# EAGLE board PowerBus (EAGLE 6.4)
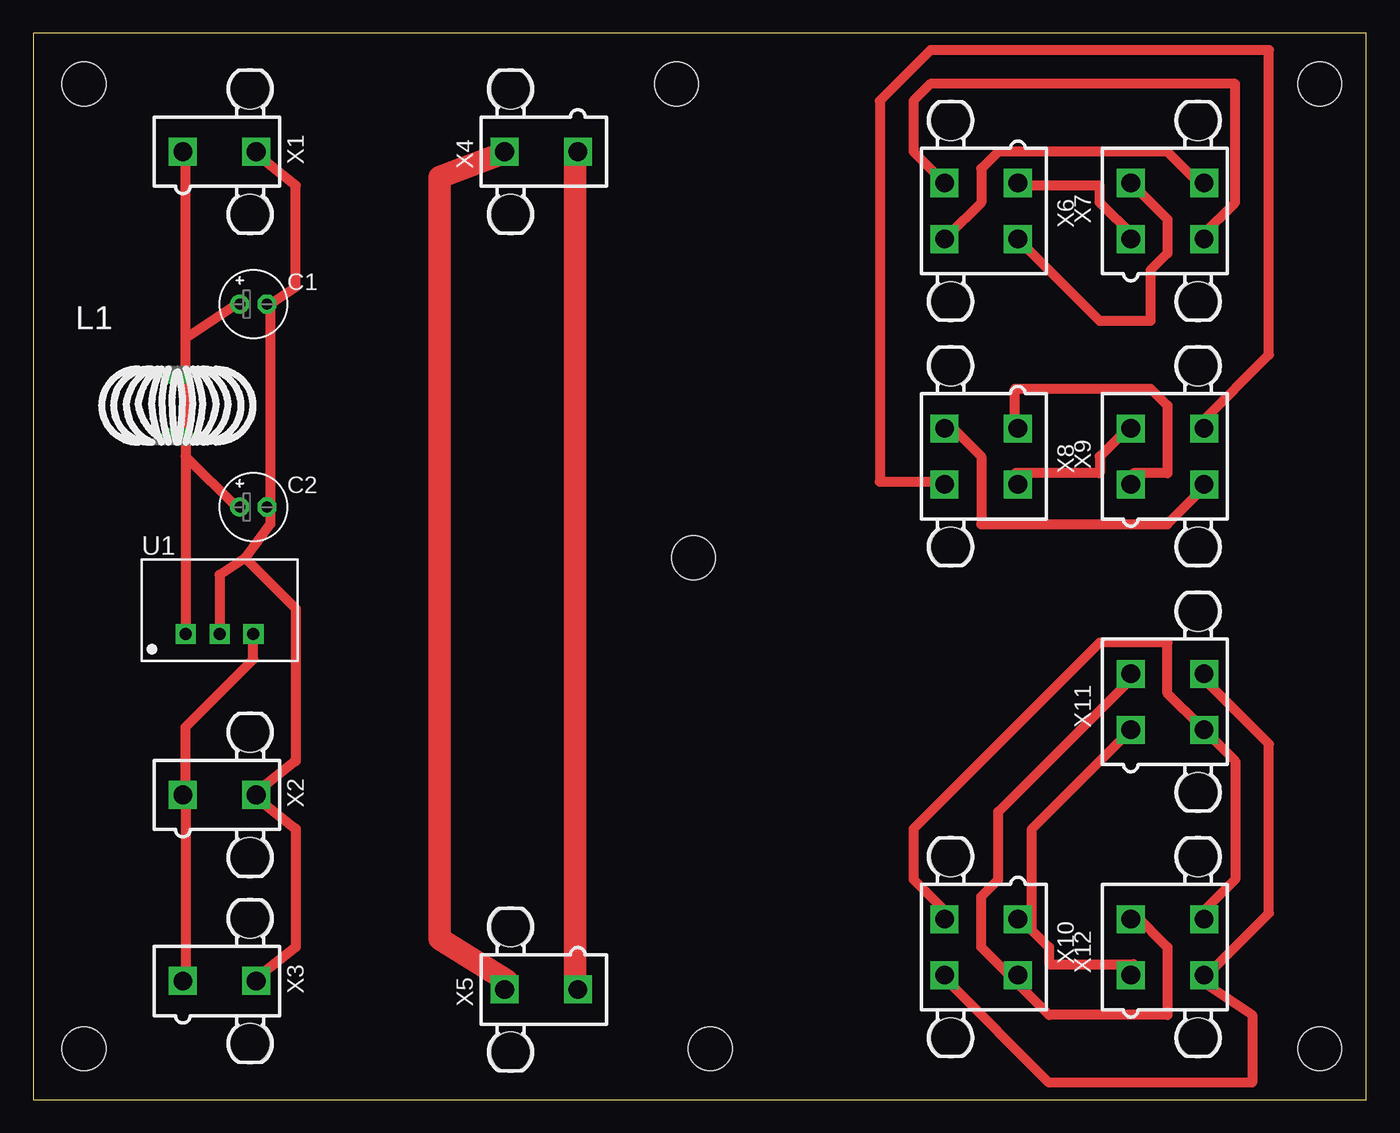
[diagram p0: board, top side]

Size 100 x 80 mm. Coordinates in mm from the lower left corner, seen from the top.
Outline: 0,0 100,0 100,80 0,80 0,0
Copper layers (1*16): Top 0.035mm / dielectric 1.5mm / Bottom 0.035mm
Design rules "SparkFun *": minimum track width 30mil, minimum drill 20mil, track to track 32mil, track to pad 32mil, pad to pad 24mil, via to via 24mil, smd to smd 8mil, copper to edge 30mil, drill to drill 30mil, minimum pad ring 12mil, minimum via ring 10mil, stop-mask expansion 4mil, vias tented up to drill 25mil, thermal gap 10mil

## Footprints (pad centres in the part's own frame; a part is rotated, then mirrored left to right if it is on the bottom)
E2-5 = drill 0.813 pad 1.27: + -1.016,0 | drill 0.813 pad 1.27 octagon: - 1.016,0
MCAP103722016A-8R2MU = drill 0.6 long: 1 0,2.261; 2 0,-2.261
TSR-1 = drill 0.9 square: 1 -2.54,0; 2 0,0; 3 2.54,0
STAND-OFF = hole 3.302: 0,0
5566-2 = drill 1.4 square: 1 0,-2.75; 2 0,2.75 | hole 3: 4.7,2.29; -4.7,2.29
5566-4 = drill 1.4 square: 1 2.1,-2.75; 2 -2.1,-2.75; 3 2.1,2.75; 4 -2.1,2.75 | hole 3: 6.8,2.29; -6.8,2.29

## Placement (x,y rotation side)
C1  4.7uF/50V  [E2-5]  16.51,59.69 0 top
C2  4.7uF/50V  [E2-5]  16.51,44.45 0 top
L1  8.2uH/.02ohm/2A  [MCAP103722016A-8R2MU]  10.79,52.07 0 top
U1  TSR_1-24120  [TSR-1]  13.97,34.92 0 top
U$1  [STAND-OFF]  3.81,76.2 0 top
U$2  [STAND-OFF]  3.81,3.81 0 top
U$3  [STAND-OFF]  50.8,3.81 0 top
U$4  [STAND-OFF]  96.52,76.2 0 top
U$5  [STAND-OFF]  96.52,3.81 0 top
U$6  [STAND-OFF]  48.26,76.2 0 top
U$7  [STAND-OFF]  49.53,40.64 0 top
X1  5566-2  [5566-2]  13.97,71.12 270 top
X2  5566-2  [5566-2]  13.97,22.86 270 top
X3  5566-2  [5566-2]  13.97,8.89 270 top
X4  5566-2  [5566-2]  38.1,71.12 90 top
X5  5566-2  [5566-2]  38.1,8.26 90 top
X6  5566-4  [5566-4]  71.12,66.67 90 top
X7  5566-4  [5566-4]  85.09,66.67 270 top
X8  5566-4  [5566-4]  71.12,48.26 90 top
X9  5566-4  [5566-4]  85.09,48.26 270 top
X10  5566-4  [5566-4]  71.12,11.43 90 top
X11  5566-4  [5566-4]  85.09,29.84 270 top
X12  5566-4  [5566-4]  85.09,11.43 270 top

## Library data of the parts
C1 C2 = rcl
L1 = inductor-multicomp
U1 = _traco_tsr-1
U$1-U$7 = SparkFun-Electromechanical
X1-X5 = con-molex; OC_FARNELL: 1822072; OC_NEWARK: unknown
X6-X12 = con-molex; OC_FARNELL: unknown; OC_NEWARK: unknown

## Nets
GND: C1.- C2.- U1.2 X1.2 X2.2 X3.2
N$1: X6.1 X7.1
N$2: X6.2 X7.2
N$3: X6.3 X7.3
N$4: X6.4 X7.4
N$5: X4.1 X5.1
N$6: X4.2 X5.2
N$7: X8.1 X9.1
N$8: X8.2 X9.2
N$9: X8.3 X9.3
N$10: X8.4 X9.4
N$11: X10.1 X11.1 X12.1
N$12: X10.2 X11.2 X12.2
N$13: X10.3 X11.3 X12.4
N$14: X10.4 X11.4 X12.3
VI: C1.+ C2.+ L1.1 L1.2 U1.1 X1.1
VO: U1.3 X2.1 X3.1

## Tracks (layer width: path | path; a pad name or v marks a point on that pad's centre or on a via)
GND
  Top 0.762: 16.51,22.86 19.68,20.32 19.68,11.43 16.51,8.89 X3.2 | 17.78,59.69 17.78,44.45 | U1.2 13.97,39.37 15.88,40.64 | 15.88,40.64 17.78,43.18 17.78,44.45 | 17.78,44.45 C2.- | 17.78,59.69 19.68,60.96 19.68,68.58 16.51,71.12 X1.2 | 17.78,59.69 C1.- | 16.51,22.86 19.68,25.4 19.68,36.83 15.88,40.64 | 16.51,22.86 X2.2
N$1
  Top 0.762: X6.1 73.66,68.58 80.01,68.58 80.01,67.31 82.55,64.77 X7.1
N$2
  Top 0.762: X6.2 73.66,64.77 80.01,58.42 83.82,58.42 83.82,62.23 85.09,63.5 85.09,66.04 82.55,68.58 X7.2
N$3
  Top 0.762: X6.3 68.58,68.58 66.04,71.12 66.04,74.93 67.31,76.2 90.17,76.2 90.17,67.31 87.63,64.77 X7.3
N$4
  Top 0.762: X6.4 68.58,64.77 71.12,67.31 71.12,69.85 72.39,71.12 85.09,71.12 87.63,68.58 X7.4
N$5
  Top 0.762: 40.64,8.89 X5.1 | 40.64,71.12 X4.1
  Top 1.676: 40.64,71.12 40.64,8.89
N$6
  Top 0.762: 35.56,8.89 X5.2 | 35.56,71.12 X4.2
  Top 1.676: 35.56,8.89 30.48,12.06 30.48,69.22 35.56,71.12
N$7
  Top 0.762: X9.1 82.55,46.99 85.09,46.99 85.09,52.07 83.82,53.34 73.66,53.34 73.66,50.8 X8.1
N$8
  Top 0.762: X8.2 73.66,46.99 80.01,46.99 80.01,48.26 82.55,50.8 X9.2
N$9
  Top 0.762: X9.3 87.63,45.72 85.09,43.18 71.12,43.18 71.12,48.26 68.58,50.8 X8.3
N$10
  Top 0.762: X8.4 68.58,46.35 63.5,46.35 63.5,74.93 67.31,78.74 92.71,78.74 92.71,55.88 87.63,50.8 X9.4
N$11
  Top 0.762: 74.93,12.7 73.66,13.97 X10.1 | 74.93,12.7 76.2,11.43 76.2,10.16 82.55,10.16 X12.1 | 74.93,12.7 74.93,20.32 82.55,27.94 X11.1
N$12
  Top 0.762: 73.66,8.89 76.2,6.35 85.09,6.35 85.09,11.43 82.55,13.97 X12.2 | 73.66,8.89 71.12,11.43 71.12,15.24 72.39,16.51 72.39,21.59 82.55,31.75 X11.2 | 73.66,8.89 X10.2
N$13
  Top 0.762: 87.63,27.94 85.09,30.48 85.09,34.29 80.01,34.29 66.04,20.32 66.04,16.51 68.58,13.97 X10.3 | 87.63,27.94 90.17,25.4 90.17,16.51 87.63,13.97 X12.4 | 87.63,27.94 X11.3
N$14
  Top 0.762: 87.63,8.89 91.44,6.35 91.44,1.27 76.2,1.27 68.58,8.89 X10.4 | 87.63,8.89 92.71,13.97 92.71,26.67 87.63,31.75 X11.4 | 87.63,8.89 X12.3
VI
  Top 0.762: 11.43,54.61 11.43,49.53 | 11.43,48.26 15.24,44.45 C2.+ | 11.43,49.53 11.43,48.26 | 11.43,49.53 L1.2 | 11.43,57.15 15.24,59.69 C1.+ | 11.43,54.61 11.43,57.15 | 11.43,54.61 L1.1 | 11.43,48.26 U1.1 | 11.43,57.15 11.43,71.12 X1.1
VO
  Top 0.762: U1.3 16.51,33.02 11.43,27.94 11.43,22.86 | 11.43,22.86 11.43,8.89 X3.1 | 11.43,22.86 X2.1